# Allegro board Touch_Board_03AUG15_1930.brd
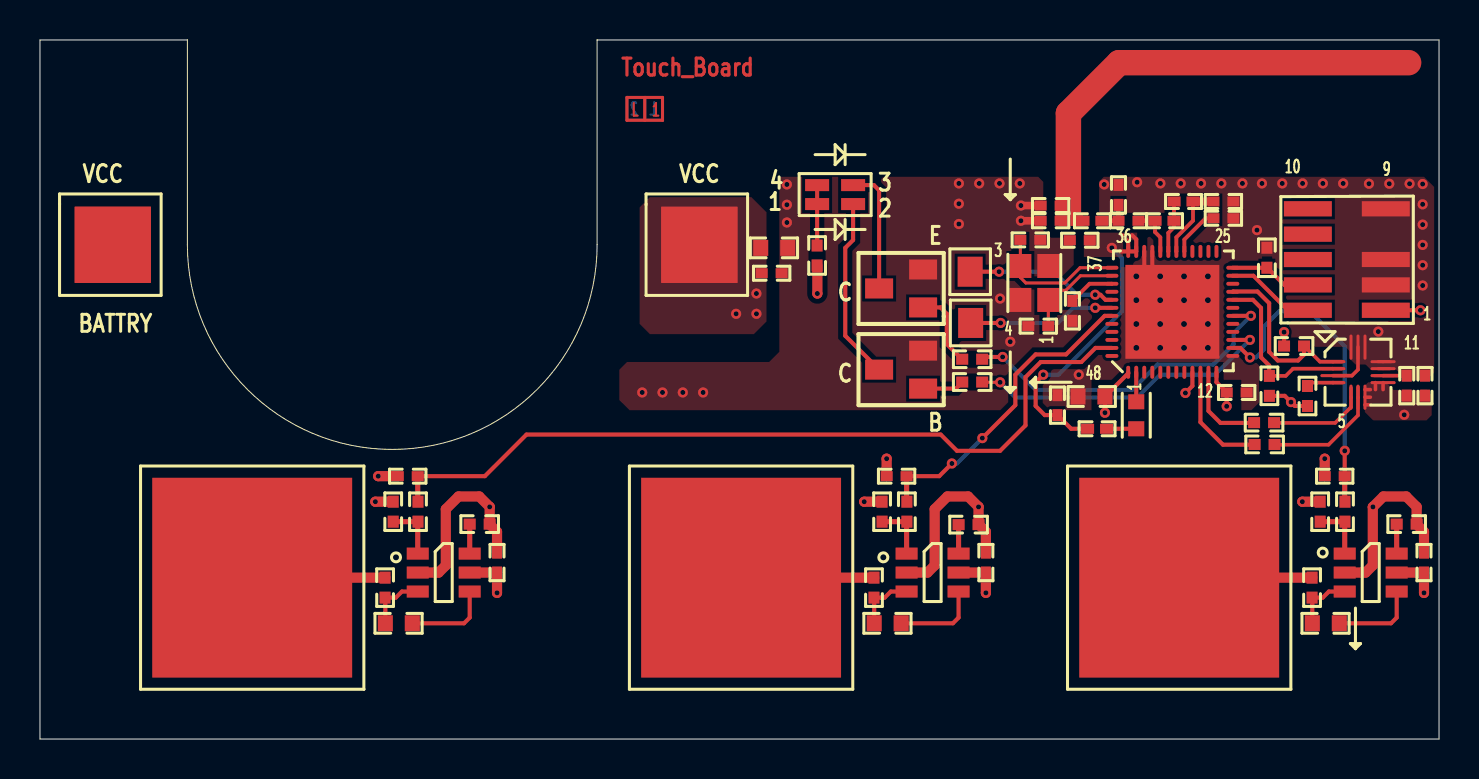
[diagram p0: board, top side]
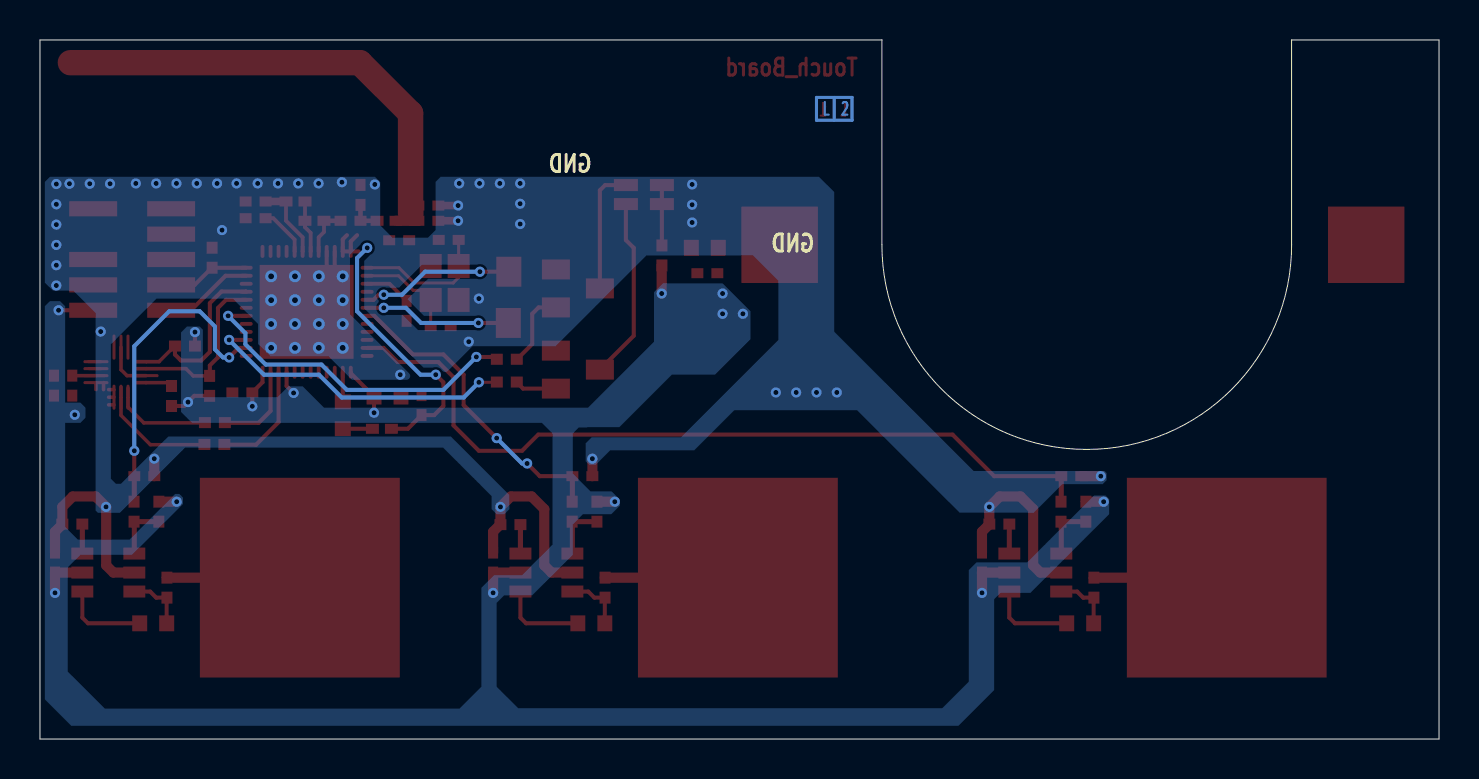
[diagram p1: board, bottom side, seen from below]

Outline 70 x 35 mm; copper layers: TOP, BOTTOM. Coordinates in mm from the lower left corner of the outline.
Outline path: 0,35 0,0 70,0 70,35 27.88,35 27.88,24.75 arc(17.63,14.5) 7.38,24.75 7.38,35 0,35

## Design rules (mm)
net group DEFAULT: nets ACCELRO_INT1 ACCELRO_INT2 ANT ANT1 ANT2 DEC1 DEC2 LED_GREEN LED_RED N13796 N13800 N17550 N6850732 N6850852 N6939062 N6939144 N6940348 N6940430 N6964656 N6964660 N6964776 N6992020 N6992072 N6992164 N6992192 SCL SDA SNS_1 SNSK_1 SWDCLK SWDIO TOUCH_KEY_1 TOUCH_KEY_2 TOUCH_KEY_3 UART_RX UART_TX XC1 XC2
net group POWER: nets N6850940 N6939236 N6940522 VDD PA

## Placement (name value [footprint] x y rotation side)
C1  0.8pF  [C0402]  53.96 27.24 90 top
C2  2.2nF  [C0402]  59.21 26.91 0 top
C3  1.5pF  [C0402]  50.57 26.71 180 top
C4  47nF  [C0402]  59.21 26.07 0 top
C5  1.5pF  [C0402]  50.57 25.95 180 top
C6  2.2pF  [C0402]  54.46 25.95 180 top
C7  12pF  [C0402]  49.55 24.99 180 top
C8  1nF  [C0402]  52.03 24.97 180 top
C9  4.7uF  [C0603]  36.74 24.59 0 top
C10  1uF  [C0402]  36.61 23.32 0 top
C11  100nF  [C0402]  51.66 21.44 270 top
C12  12pF  [C0402]  49.95 20.67 0 top
C13  100nF  [C0402]  68.38 17.69 90 top
C14  1uF  [C0402]  69.3 17.69 90 top
C15  100nF  [C0402]  59.88 17.35 0 top
C16  4.7uF  [C0603]  52.61 17.15 180 top
C17  1uF  [C0402]  50.91 16.72 90 top
C18  100nF  [C0402]  18.4 13.16 180 top
C19  100nF  [C0402]  42.86 13.16 180 top
C20  100nF  [C0402]  64.78 13.16 180 top
C21  100nF  [C0402]  22.87 8.83 90 top
C22  100nF  [C0402]  47.33 8.83 90 top
C23  100nF  [C0402]  69.25 8.83 90 top
C24  6.8nF  [C0603]  17.95 5.8 0 top
C25  6.8nF  [C0603]  42.41 5.8 0 top
C26  6.8nF  [C0603]  64.33 5.8 0 top
J1  CON2  [BAT_2PIN_30_78P]  17.63 24.75 0 top
L1  10nH  [L0402]  57.22 26.91 180 top
L2  3.3nH  [L0402]  52.66 25.95 180 top
L3  4.7nH  [L0402]  56.27 25.95 180 top
L4  10uH  [L0603]  54.85 16.21 270 top
L5  15nH  [L0402]  52.89 15.53 180 top
NOREF  -  []  0 0 0 top
NOREF#2  -  []  70 0 90 top
NOREF#3  -  []  7.38 24.75 0 top
NOREF#4  -  []  0 35 0 top
NOREF#5  -  []  13.89 15.21 0 top
NOREF#6  -  []  27.88 35 0 top
P1  FTSH-105  [FTSH-105-01-L-DV]  65.39 24.01 90 top
Q1  NPN BCE  [SOT23]  43.09 22.56 180 top
Q2  NPN BCE  [SOT23]  43.09 18.5 180 top
R1  33  [R0402]  38.9 24.21 270 top
R2  12K  [R0402]  61.4 24.1 270 top
R3  10K  [R0402]  62.75 19.69 0 top
R4  23K  [R0402]  46.64 19 180 top
R5  23K  [R0402]  46.64 17.86 180 top
R6  10K  [R0402]  61.5 17.68 90 top
R7  0 Ohm  [R0402]  63.43 17.17 270 top
R8  0 Ohm  [R0402]  61.25 15.83 180 top
R9  0 Ohm  [R0402]  61.27 14.74 180 top
R10  DNM  [R0402]  17.66 11.38 90 top
R11  4.7K  [R0402]  18.9 11.38 90 top
R12  DNM  [R0402]  42.12 11.38 90 top
R13  4.7K  [R0402]  43.36 11.38 90 top
R14  DNM  [R0402]  64.04 11.38 90 top
R15  4.7K  [R0402]  65.28 11.38 90 top
R16  33  [R0402]  22 10.75 180 top
R17  33  [R0402]  46.46 10.75 0 top
R18  33  [R0402]  68.38 10.75 180 top
R19  4.7K  [R0402]  17.28 7.58 270 top
R20  4.7K  [R0402]  41.74 7.58 270 top
R21  4.7K  [R0402]  63.66 7.58 270 top
RX  TEST POINT  [TP]  46.57 20.83 0 top
TX  TEST POINT  [TP]  46.54 23.4 0 top
U1  LED_RG  [SMD_CHIP_LED_LAMP]  39.78 27.26 180 top
U2  nRF51822-QFAA  [QFN40P600X600X90-48N]  56.66 21.39 270 top
U3  LIS2DH  [14PIN_LGA_LIS2DH]  65.95 18.37 0 top
U4  AT42QT1011  [SOP95P280X145-6N]  20.2 8.34 0 top
U5  AT42QT1011  [SOP95P280X145-6N]  44.66 8.34 0 top
U6  AT42QT1011  [SOP95P280X145-6N]  66.58 8.34 0 top
U7  DNM  [TP_40RD_SMT_PAD393_7]  10.62 8.08 0 top
U8  DNM  [TP_40RD_SMT_PAD393_7]  35.08 8.08 0 top
U9  DNM  [TP_40RD_SMT_PAD393_7]  57 8.08 180 top
X1  16MHz  [BT-XTAL_2520]  49.75 22.83 90 top

## Library data of the parts
C1-C8 C11-C13 C15-C17 = CAPACITOR NON-POL
C9 C10 C18-C26 = CAPACITOR
C14 = CAP NP
J1 = CON2_1
L1-L5 = INDUCTOR
P1 = FTSH-105
Q1 Q2 = NPN BCE_0: Tolerance: TOLERANCE; User Part Number: PART_NO
R1-R21 = RESISTOR
RX TX = TEST POINT
U1 = LED_RG
U2 = nRF51822-QFAA_0
U3 = LIS3DE_2
U4-U6 = AT42QT1012_0
U7-U9 = Sense Electrode
X1 = CRYSTAL_1

## Footprints (pads in the part's own frame, mm; a bottom-side part is the same pattern mirrored in y, then rotated)
14PIN_LGA_LIS2DH
  oval 1.258x0.15 smd: 1(-1.254,0.525) 2(-1.254,0.175) 3(-1.254,-0.175) 4(-1.254,-0.525) 8(1.254,-0.525) 9(1.254,-0.175) 10(1.254,0.175) 11(1.254,0.525)
  oval 0.15x1.258 smd: 5(-0.35,-1.254) 6(0,-1.254) 7(0.35,-1.254) 12(0.35,1.254) 13(0,1.254) 14(-0.35,1.254)
BAT_2PIN_30_78P
  rect 3.81x3.81 smd: 1(-13.981,0) 2(15.365,0) 3(-13.981,0.013) 4(15.365,0.013)
BT-XTAL_2520
  rect 1.2x1.099 smd: 1(-0.85,-0.699) 2(0.85,-0.699) 3(0.85,0.699) 4(-0.85,0.699)
C0402
  rect 0.599x0.5 smd: 1(-0.5,0) 2(0.5,0)
C0603
  rect 0.749x0.8 smd: 1(-0.674,0) 2(0.674,0)
FTSH-105-01-L-DV
  rect 0.76x2.399 smd: 1(-2.54,-1.95) 2(-2.54,1.95) 3(-1.27,-1.95) 4(-1.27,1.95) 5(0,-1.95) 6(0,1.95) 8(1.27,1.95) 9(2.54,-1.95) 10(2.54,1.95)
L0402
  rect 0.65x0.5 smd: 1(-0.475,0) 2(0.475,0)
L0603
  rect 0.749x0.8 smd: 1(-0.676,0) 2(0.676,0)
QFN40P600X600X90-48N
  oval 0.65x0.193 smd: 1(3.025,-2.208) 2(3.025,-1.806) 3(3.025,-1.405) 4(3.025,-1.004) 5(3.025,-0.602) 6(3.025,-0.201) 7(3.025,0.201) 8(3.025,0.602) 9(3.025,1.004) 10(3.025,1.405) 11(3.025,1.806) 12(3.025,2.208) 25(-3.025,2.208) 26(-3.025,1.806) 27(-3.025,1.405) 28(-3.025,1.004) 29(-3.025,0.602) 30(-3.025,0.201) 31(-3.025,-0.201) 32(-3.025,-0.602) 33(-3.025,-1.004) 34(-3.025,-1.405) 35(-3.025,-1.806) 36(-3.025,-2.208)
  oval 0.193x0.65 smd: 13(2.208,3.025) 14(1.806,3.025) 15(1.405,3.025) 16(1.004,3.025) 17(0.602,3.025) 18(0.201,3.025) 19(-0.201,3.025) 20(-0.602,3.025) 21(-1.004,3.025) 22(-1.405,3.025) 23(-1.806,3.025) 24(-2.208,3.025) 37(-2.208,-3.025) 38(-1.806,-3.025) 39(-1.405,-3.025) 40(-1.004,-3.025) 41(-0.602,-3.025) 42(-0.201,-3.025) 43(0.201,-3.025) 44(0.602,-3.025) 45(1.004,-3.025) 46(1.405,-3.025) 47(1.806,-3.025) 48(2.208,-3.025)
  rect 4.699x4.699 smd: 49(0,0)
R0402
  rect 0.599x0.551 smd: 1(-0.5,0) 2(0.5,0)
SMD_CHIP_LED_LAMP
  rect 1.2x0.6 smd: 1(0.9,0.475) 2(-0.9,0.475) 3(-0.9,-0.475) 4(0.9,-0.475)
SOP95P280X145-6N
  rect 1.1x0.6 smd: 1(-1.3,0.95) 2(-1.3,0) 3(-1.3,-0.95) 4(1.3,-0.95) 5(1.3,0) 6(1.3,0.95)
SOT23
  rect 1.4x1 smd: B(-1.1,0.95) C(1.1,0) E(-1.1,-0.95)
TP
  rect 1.25x1.5 smd: 1(0,0)
TP_40RD_SMT_PAD393_7
  rect 10x10 smd: 1(0,0)

## Nets
AVDD: C8.1 C17.1 L5.2 U2.35(AVDD1) U2.36(AVDD)
GND_SIGNAL: C1.2 C2.2 C3.2 C4.2 C5.2 C7.1 C8.2 C9.2 C10.2 C11.2 C12.1 C13.2 C14.2 C15.2 C16.2 C17.2 C18.2 C19.2 C20.2 C21.2 C22.2 C23.2 J1.4 P1.3 P1.5 P1.9 Q1.E Q2.E R2.1 R16.1 R17.2 R18.1 U2.13(VSS) U2.33(VSS1) U2.34(VSS2) U2.49(EPAD) U3.3(SA0) U3.9(GND) U3.10(RES1) U3.11(RES2) U3.12(RES3) U3.13(RES4) U3.14(RES5) U4.2(GND) U5.2(GND) U6.2(GND) X1.2 X1.4
VDD: C9.1 C10.1 C13.1 C14.1 C15.1 C16.1 C21.1 C22.1 C23.1 J1.2 P1.1 R1.2 R3.1 R6.1 R7.2 R10.2 R12.2 R14.2 U2.1(VDD) U2.9(P0.05) U2.12(VDD1) U3.7(VDD_IO) U3.8(VDD) U4.5(VDD) U5.5(VDD) U6.5(VDD)
VDD PA: C2.1 L1.1 U2.30(VDD_PA)
ACCELRO_INT1: R9.2 U2.10(P0.06)
ACCELRO_INT2: R8.2 U2.11(P0.07)
ANT: C3.1 C5.1 L2.2
ANT1: L1.2 L3.1 U2.31(ANT1)
ANT2: C6.1 L3.2 U2.32(ANT2)
DEC1: C11.1 U2.39(DEC1)
DEC2: C4.1 U2.29(DEC2)
LED_GREEN: R4.1 U2.18(P0.12)
LED_RED: R5.1 U2.15(P0.09)
SCL: R3.2 U2.21(P0.15) U3.1(SCL)
SDA: R6.2 U2.20(P0.14) U3.2(SDA)
SNS_1: C24.2 U4.4(SNS)
SNS_2: C25.2 U5.4(SNS)
SNS_3: C26.2 U6.4(SNS)
SNSK_1: C24.1 R19.2 U4.3(SNSK)
SNSK_2: C25.1 R20.2 U5.3(SNSK)
SNSK_3: C26.1 R21.2 U6.3(SNSK)
SWDCLK: P1.4 R2.2 U2.24(SWDCLK)
SWDIO: P1.2 U2.23(SWDIO/NRESET)
TOUCH_KEY_1: C18.1 R11.2 U2.47(P0.28)
TOUCH_KEY_2: C19.1 R13.2 U2.43(P0.24)
TOUCH_KEY_3: C20.1 R15.2 U2.14(P0.08)
UART_RX: RX.1 U2.42(P0.23)
UART_TX: TX.1 U2.41(P0.22)
XC1: C7.2 U2.37(XC1) X1.3
XC2: C12.2 U2.38(XC2) X1.1
N13796: L4.2 L5.1
N13800: L4.1 U2.2(DCC)
N17550: C1.1 C6.2 L2.1
N6850732: R10.1 R11.1 U4.1(OUT)
N6850852: R16.2 U4.6(MODE)
N6850940: R19.1 U7.1
N6939062: R12.1 R13.1 U5.1(OUT)
N6939144: R17.1 U5.6(MODE)
N6939236: R20.1 U8.1
N6940348: R14.1 R15.1 U6.1(OUT)
N6940430: R18.2 U6.6(MODE)
N6940522: R21.1 U9.1
N6964656: R8.1 U3.5(INT2)
N6964660: R9.1 U3.6(INT1)
N6964776: R7.1 U3.4(CS)
N6992020: R1.1 U1.1 U1.4
N6992072: Q2.C U1.2
N6992164: Q1.C U1.3
N6992192: Q1.B R4.2
N69974480: Q2.B R5.2

Pads without a net: J1 1 3; P1 6 8 10; U2 3 4 5 6 7 8 16 17 19 22 25 26 27 28 40 44 45 46 48

## Via types
v1: diameter 0.508, hole 0.254, TOP to BOTTOM, 78 vias
v2: diameter 0.599, hole 0.3, TOP to BOTTOM, 16 vias

## Routing (per net, layer and track width the routed paths; a pad name or vN(x,y) marks a point on that pad's centre or on a via; arc(x,y) is an arc through that point)
AVDD: length 16.1
  TOP w0.203: 54.14,25.23 54.45,24.91 U2.36 ; U2.36 U2.35 54.85,25.02 54.64,25.23 ; U2.36 54.06,24.41 ; L5.2 51.59,15.53 C17.1 50.27,16.22 49.82,16.67 49.82,17.86 v1(50.2,18.24)
  BOTTOM w0.203: v1(53.63,24.59) 54.14,24.08 54.14,21.42 50.96,18.24 v1(50.2,18.24)
GND_SIGNAL: length 41.4
  TOP w0.152: 67.58,18.89 U3.11 66.95,18.89 ; 67.55,18.54 U3.10 66.95,18.54 ; U3.9 66.76,18.19
  TOP w0.178: U3.3 65.64,18.19 65.95,18.5 U3.13 ; U3.9 C13.2
  TOP w0.203: U2.34 55.25,23.56 v2(54.85,23.17) ; U2.33 55.65,23.56 v2(56.05,23.17)
  TOP w0.381: C3.2 v1(49.08,26.71) ; C5.2 v1(49.08,25.95)
  TOP w0.508: U6.2 66.33,8.34 66.69,8.69 66.69,11.62 v1(66.69,11.62) 67.22,12.15 68.36,12.15 68.88,11.62 R18.1 69.25,10.38 C23.2 ; C21.2 22.87,10.38 R16.1 v1(22.5,11.62) 21.98,12.15 20.94,12.15 20.31,11.51 20.31,8.69 19.95,8.34 U4.2 ; C22.2 47.33,10.38 R17.2 v1(46.96,11.62) 46.44,12.15 45.4,12.15 44.77,11.51 44.77,8.69 44.41,8.34 U5.2 ; C19.2 v1(42.36,14.04) ; C20.2 v1(64.28,14.04) ; C18.2 v1(16.92,13.16)
  vias: v1(30.13,17.35) v1(31.15,17.35) v1(32.16,17.35) v1(33.18,17.35) v1(37.37,27.77) v1(37.37,26.75) v1(37.37,25.86) v1(45.98,27.82) v1(45.98,26.8) v1(45.98,25.78) v1(46.99,27.82) v1(48.01,27.82) v1(48.04,22.05) v1(48.55,19.89) v1(49.02,27.82) v1(51.98,18.24) v1(53.25,27.77) v1(54.89,27.88) v1(56.06,27.82) v1(57.08,27.82) v1(58.09,27.82) v1(59.11,27.82) v1(60.16,27.82) v1(60.89,25.48) v1(61.14,27.82) v1(62.16,27.82) v1(63.17,27.82) v1(64.19,27.82) v1(65.2,27.82) v1(66.49,27.8) v1(66.96,20.4) v1(67.51,27.8) v1(68.53,27.8) v1(69.18,27.79) v1(69.18,26.77) v1(69.18,25.75) v1(69.18,24.74) v1(69.18,23.72) v1(69.18,22.71) v2(54.85,21.97) v2(54.85,20.78) v2(54.85,19.58) v2(56.05,21.97) v2(56.05,20.78) v2(56.05,19.58) v2(57.24,23.17) v2(57.24,21.97) v2(57.24,20.78) v2(57.24,19.58) v2(58.44,23.17) v2(58.44,21.97) v2(58.44,20.78) v2(58.44,19.58)
VDD: length 22.9
  TOP w0.178: 66.82,17.84 66.82,17.5 ; U3.8 67.2,17.5 ; 66.3,16.73 66.57,16.73 ; 66.3,17.5 66.57,17.5 ; U3.7 66.57,17.11
  TOP w0.203: R3.1 v1(62.25,20.37) ; v1(59.38,16.66) C15.1 58.87,17.86 U2.12 ; U2.1 54.45,18.31 C16.1 v1(53.29,16.34) ; v1(57.31,17.33) 57.66,17.68 U2.9 ; P1.1 v1(69.07,21.47) ; R7.2 62.79,16.67 v1(62.59,16.87) 62.28,17.18 R6.1
  TOP w0.508: R1.2 v1(38.9,22.31) ; R12.2 v1(41.24,11.88) ; U4.5 C21.1 v1(22.87,7.32) ; R10.2 v1(16.78,11.88) ; U6.5 C23.1 v1(69.25,7.32) ; U5.5 C22.1 v1(47.33,7.32) ; R14.2 v1(63.16,11.88)
  vias: v1(34.83,21.29) v1(35.85,22.31) v1(35.85,21.29) v1(68.26,16.23)
VDD PA: length 3.9
  TOP w0.191: L1.1 57.69,25.95 56.86,25.12 U2.30
  TOP w0.381: L1.1 C2.1
ACCELRO_INT1: length 5.7
  TOP w0.203: R9.2 59.19,14.74 58.06,15.86 U2.10
ACCELRO_INT2: length 4.5
  TOP w0.203: U2.11 58.46,16.43 59.06,15.83 R8.2
ANT: length 1.9
  TOP w0.508: L2.2 C5.1 C3.1
ANT1: length 2.6
  TOP w0.191: L1.2 L3.1 56.74,25.63 56.46,25.34 U2.31
ANT2: length 2.5
  TOP w0.191: U2.32 56.06,25.12 55.79,25.38 L3.2
  TOP w0.229: L3.2 C6.1
DEC1: length 2.3
  TOP w0.191: U2.39 52.51,22.79 C11.1
DEC2: length 2.5
  TOP w0.191: U2.29 57.26,24.41 57.26,25.01 58.33,26.07 C4.1
LED_GREEN: length 16.9
  TOP w0.203: U2.18 v1(60.59,21.19) ; R4.1 47.27,19.13 v1(48.17,19.13)
  BOTTOM w0.203: v1(48.17,19.13) 49.82,17.48 54.64,17.48 55.91,18.75 58.71,18.75 59.72,19.77 59.72,20.32 v1(60.59,21.19)
LED_RED: length 15.8
  TOP w0.152: R5.1 v1(48.04,17.86)
  TOP w0.203: U2.15 v1(60.54,19.98)
  BOTTOM w0.203: v1(60.54,19.98) 58.79,18.24 56.04,18.24 54.9,17.1 48.8,17.1 v1(48.04,17.86)
Net_4: length 23.1
  TOP w1.27: 51.46,26.33 51.46,31.33 53.99,33.86 68.48,33.86
SCL: length 9.2
  TOP w0.178: 65.17,18.89 U3.1 64.04,18.89 R3.2
  TOP w0.203: R3.2 63.25,19.25 62.95,18.95 61.93,18.95 61.5,19.38 61.5,21.82 60.92,22.41 59.7,22.41 U2.21
SDA: length 8.9
  TOP w0.178: 65.14,18.54 U3.2 62.69,18.54 62.33,18.18 R6.2
  TOP w0.203: R6.2 61.5,18.7 61.09,19.11 61.09,21.58 60.69,21.99 U2.20
SNS_1: length 4.3
  TOP w0.203: C24.2 21.22,5.8 21.5,6.08 U4.4
SNS_2: length 4.3
  TOP w0.203: U5.4 45.96,6.08 45.68,5.8 C25.2
SNS_3: length 4.3
  TOP w0.203: U6.4 67.88,6.08 67.6,5.8 C26.2
SNSK_1: length 3
  TOP w0.203: U4.3 18.11,7.38 17.8,7.08 R19.2 C24.1
SNSK_2: length 3
  TOP w0.203: C25.1 R20.2 42.26,7.08 42.57,7.38 U5.3
SNSK_3: length 3
  TOP w0.203: C26.1 R21.2 64.18,7.08 64.49,7.38 U6.3
SWDCLK: length 4.1
  TOP w0.203: U2.24 R2.2 62.26,22.74 P1.4
SWDIO: length 4.5
  TOP w0.203: U2.23 60.71,23.19 62.44,21.47 P1.2
TOUCH_KEY_1: length 40.8
  TOP w0.203: C18.1 22.26,13.16 24.34,15.24 45.07,15.24 45.88,14.43 48.04,14.43 49.31,15.7 49.31,18.11 50.07,18.88 52.1,18.88 52.81,19.58 U2.47
  TOP w0.254: C18.1 R11.2
TOUCH_KEY_2: length 15.8
  TOP w0.203: C19.1 44.99,13.16 v1(45.63,13.8) ; U2.43 53.27,21.19 51.34,19.26 49.82,19.26 48.8,18.24 48.8,16.72 v1(47.15,15.07)
  TOP w0.254: C19.1 R13.2
  BOTTOM w0.203: v1(47.15,15.07) 45.88,13.8 v1(45.63,13.8)
TOUCH_KEY_3: length 15.9
  TOP w0.203: C20.1 v1(65.28,14.43) ; U2.14 60.06,19.58 v1(60.54,19.1)
  TOP w0.254: R15.2 C20.1
  BOTTOM w0.203: v1(65.28,14.43) 65.28,19.67 63.53,21.42 62.01,21.42 61.25,20.65 61.25,19.51 60.84,19.1 v1(60.54,19.1)
UART_RX: length 7.4
  TOP w0.203: U2.42 53.05,21.59 v1(52.8,21.59) ; RX.1 v1(48.06,20.83)
  BOTTOM w0.203: v1(48.06,20.83) 50.93,20.83 51.69,21.59 v1(52.8,21.59)
UART_TX: length 7.7
  TOP w0.203: U2.41 53.31,21.99 53.06,22.24 v1(52.8,22.24) ; TX.1 v1(47.99,23.4)
  BOTTOM w0.203: v1(52.8,22.24) 51.88,22.24 50.73,23.4 v1(47.99,23.4)
XC1: length 6.9
  TOP w0.152: U2.37 52.04,23.6 51.27,22.83 49.33,22.83 49.05,23.11 X1.3 49.05,24.99 C7.2
XC2: length 5.1
  TOP w0.152: C12.2 X1.1 50.45,22.18 50.74,22.46 51.33,22.46 52.06,23.19 U2.38
N13796: length 1.5
  TOP w0.203: L5.1 L4.2
N13800: length 1.5
  TOP w0.203: U2.2 L4.1
N17550: length 1.6
  TOP w0.229: L2.1 C6.2 C1.1
N6850732: length 2.8
  TOP w0.254: U4.1 R11.1 R10.1
N6850852: length 1.5
  TOP w0.254: U4.6 R16.2
N6850940: length 6.7
  TOP w0.508: U7.1 R19.1
N6939062: length 2.8
  TOP w0.254: U5.1 R13.1 R12.1
N6939144: length 1.5
  TOP w0.254: U5.6 R17.1
N6939236: length 6.7
  TOP w0.508: U8.1 R20.1
N6940348: length 2.8
  TOP w0.254: U6.1 R15.1 R14.1
N6940430: length 1.5
  TOP w0.254: U6.6 R18.2
N6940522: length 6.7
  TOP w0.508: U9.1 R21.1
N6964656: length 5.1
  TOP w0.178: R8.1 64.8,15.83 65.6,16.62 U3.5 65.6,17.58
N6964660: length 6.2
  TOP w0.178: 65.95,17.61 U3.6 65.95,16.21 64.47,14.74 R9.1
N6964776: length 1.8
  TOP w0.178: R7.1 63.6,17.84 U3.4 65.17,17.84
N6992020: length 3
  TOP w0.203: R1.1 38.88,24.72 U1.1 U1.4
N6992072: length 9.2
  TOP w0.203: Q2.C 40.29,20.19 40.29,24.59 40.68,24.98 U1.2
N6992164: length 6.3
  TOP w0.203: U1.3 41.72,27.73 41.99,27.47 Q1.C
N6992192: length 3.9
  TOP w0.203: R4.2 45.37,19.77 45.37,21.29 45.05,21.61 Q1.B
N69974480: length 2.1
  TOP w0.203: Q2.B 45.83,17.54 R5.2

## Copper pours and planes (outline as drawn; the poured copper is in the pictures)
AVDD on TOP: 54.9,25.35 54.9,24.97 54.19,24.97 54.19,24.13 52.23,24.13 52.23,25.23 52.36,25.35
GND_SIGNAL on TOP: 29.5,16.46 28.99,16.97 28.99,18.5 29.37,18.88 36.48,18.88 36.99,19.38 36.99,28.15 49.94,28.15 50.2,27.89 50.2,25.48 50.58,25.1 52.48,25.1 52.99,25.61 52.99,27.91 53.23,28.15 69.25,28.15 69.76,27.64 69.76,18.37 69.38,17.99 68.36,17.99 67.85,18.5 66.58,18.5 66.33,18.75 65.82,18.75 65.57,19 65.57,19.38 65.31,19.64 62.14,19.64 60.99,18.5 60.99,16.84 60.61,16.46 60.1,16.46 60.1,17.99 59.22,17.99 59.22,18.88 54.52,18.88 54.52,17.99 52.61,17.99 52.61,16.46
GND_SIGNAL on BOTTOM: 18.85,12.76 16.83,12.76 16.63,12.96 16.63,13.32 16.73,13.42 23.29,13.42 30.26,20.39 30.26,27.39 31.02,28.15 49.96,28.15 50.21,27.9 50.21,25.48 50.59,25.1 52.36,25.1 52.98,25.72 52.98,27.89 53.24,28.15 69.5,28.15 69.76,27.89 69.76,22.85 69.35,22.45 68.33,22.45 67.22,21.33 67.22,11.44 67.1,11.33 66,11.33 62.74,14.59 49.83,14.59 47.4,12.17 47.4,11.51 47.15,11.26 46.77,11.26 46.52,11.51 46.52,12.22 49.44,15.15 63.58,15.15 65.95,12.78 66.2,12.78 66.45,13.03 66.45,19.77 64.17,22.05 60.36,22.05 59.09,20.78 59.09,19.78 58.47,19.16 55.56,19.16 54.39,17.99 50.03,17.99 48.35,19.67 44.2,19.67 39.66,24.21 34.32,24.21 33.05,22.94 33.05,19.98 37.92,15.11 42.39,15.11 42.7,14.81 42.7,13.91 42.51,13.73 42.2,13.73 41.47,14.45 37.27,14.45 35.26,16.46 29.12,16.46 23.99,11.33 20.28,11.33
VDD on TOP: 69.63,16.21 69.63,17.23 69.38,17.48 67.72,17.48 67.34,17.86 66.45,17.86 66.25,17.65 66.25,16.42 66.71,15.96 69.38,15.96
VDD on TOP: 30.01,26.62 30.01,20.78 30.51,20.27 35.72,20.27 36.36,20.91 36.36,26.37 35.59,27.13 30.51,27.13
VDD on BOTTOM: 38.39,18.24 41.03,15.6 43.04,15.6 43.34,15.3 43.34,13.29 42.45,12.4 41.4,12.4 40.98,11.98 40.98,11.69 41.42,11.26 42.83,11.26 43.34,10.75 43.34,9.22 45.37,7.19 46.77,7.19 47.15,6.82 47.15,2.62 46.08,1.55 24.86,1.55 23.53,2.87 23.53,8.46 23.15,8.84 20.61,8.84 17.26,12.19 16.68,12.19 16.51,12.01 16.51,11.26 20.44,7.32 21.94,7.32 22.26,7 22.26,2.45 24.05,0.66 68.44,0.66 69.76,1.99 69.76,21.67 69.5,21.92 68.99,21.92 68.74,21.67 68.74,16.84 67.98,16.84 67.72,16.59 67.72,16.08 67.98,15.83 68.74,15.83 68.74,10.62 68.11,9.99 65.52,9.99 63.23,12.27 63.03,12.27 62.85,12.09 62.85,11.77 65.39,9.22 67.98,9.22 68.61,8.59 68.61,3.38 66.75,1.52 49.01,1.52 47.91,2.62 47.91,7.57 47.28,8.21 45.88,8.21 44.36,9.73 44.36,15.29 44.89,15.83 62.39,15.83 62.94,16.38 62.94,20.36 62.64,20.65 62.01,20.65 61.85,20.49 61.85,17.12 58.11,17.12 57.57,17.65 56.85,17.65 55.79,16.59 42.58,16.59 39.28,19.89 39.28,22.37 38.83,22.81 35.84,22.81 34.45,21.42 34.45,20.02 36.23,18.24

## Text on the board
BOTTOM: 2 | L | L02_BOTTOM
Ref Des/Silkscreen Bottom: GND
User.Comments: VCC | C | E | B | BATTERY
TOP: L | 1 | Touch_Board | L01_TOP
Ref Des/Silkscreen Top: BATTRY | VCC
PAGE_OUTLINE: OUTLINE
DIMENSION: STACKUP INFO | LAYER 1-TOP | LAYER 2-BOT | CORE | 62.992 MILS | (1.6 MM)
TOLERANCE_TOP: C13 | C10 | C11 | C8 | L1 | C3 | C4 | C2 | C1 | D1 | A | K | 3 | 4 | D2 | C12 | 2 | 1 | X2 | L3 | C9 | 37 | 48 | C7 | C6 | L2 | C5 | 25 | 12 | 24 | 13 | U1 | Q3 | Q2 | U2 | R6 | R5 | R4 | Q1 | R3 | R1 | R2 | TX | RX | GND | VDD
USER_PART_NUM_TOP: 10. IF VIA IN PAD (VIP) SHOULD BE FILLED AND PLATTED WITH PLANNER | NOTES: | 1. ALL ARTWORK PATTERNS ARE VIEWED FROM THE TOP. | 2. PLATING FINISH METHOD SHALL BE HASL | 3. SOLDER MASK OVER BARE COPPER (SMOBC) SHALL | 4. MASK COLOUR IS GREEN AND TYPE IS LPI | 5. BOARD THICKNESS IS 1.6 MM | 6. COPPER THICKNESS | 7. PCB MATERIAL IS FR4 | 8. STACKUP SPECIFICATIONS IS AS FOLLOWS | 9. SIGNAL TRACE WIDTH 7 MILS POWER TRACEWIDTH 20 MILS (MIN 8 MILS) | BE ON BOTH SIDES. | FOR OUTER LAYERS IS 35 MICRONS | FOR INNER LAYERS IS 35 MICRONS
User.10: FABRICATION LAYER
User.11: SENSE_TOUCH BOARD | DATE:03/08/2015
User.13: LAYER2
User.14: LAYER3
User.16: ASSEMBLY_TOP
User.17: ASSEMBLY_BOTTOM
User.18: PASTE_TOP
User.19: PASTE_BOTTOM
User.20: SILK_TOP
User.21: SILK_BOTTOM
User.22: SOLDMASK_BOTTOM
User.23: SOLDMASK_TOP
User.26: FIGURE | SIZE | 10.0 | 11.799 | DRILL CHART: TOP to BOTTOM | ALL UNITS ARE IN MILS | TOLERANCE | +3.0/-3.0 | PLATED | QTY | 78 | 16
